# EAGLE board UsbEuroPowerAdaptor (EAGLE 9.6.1)
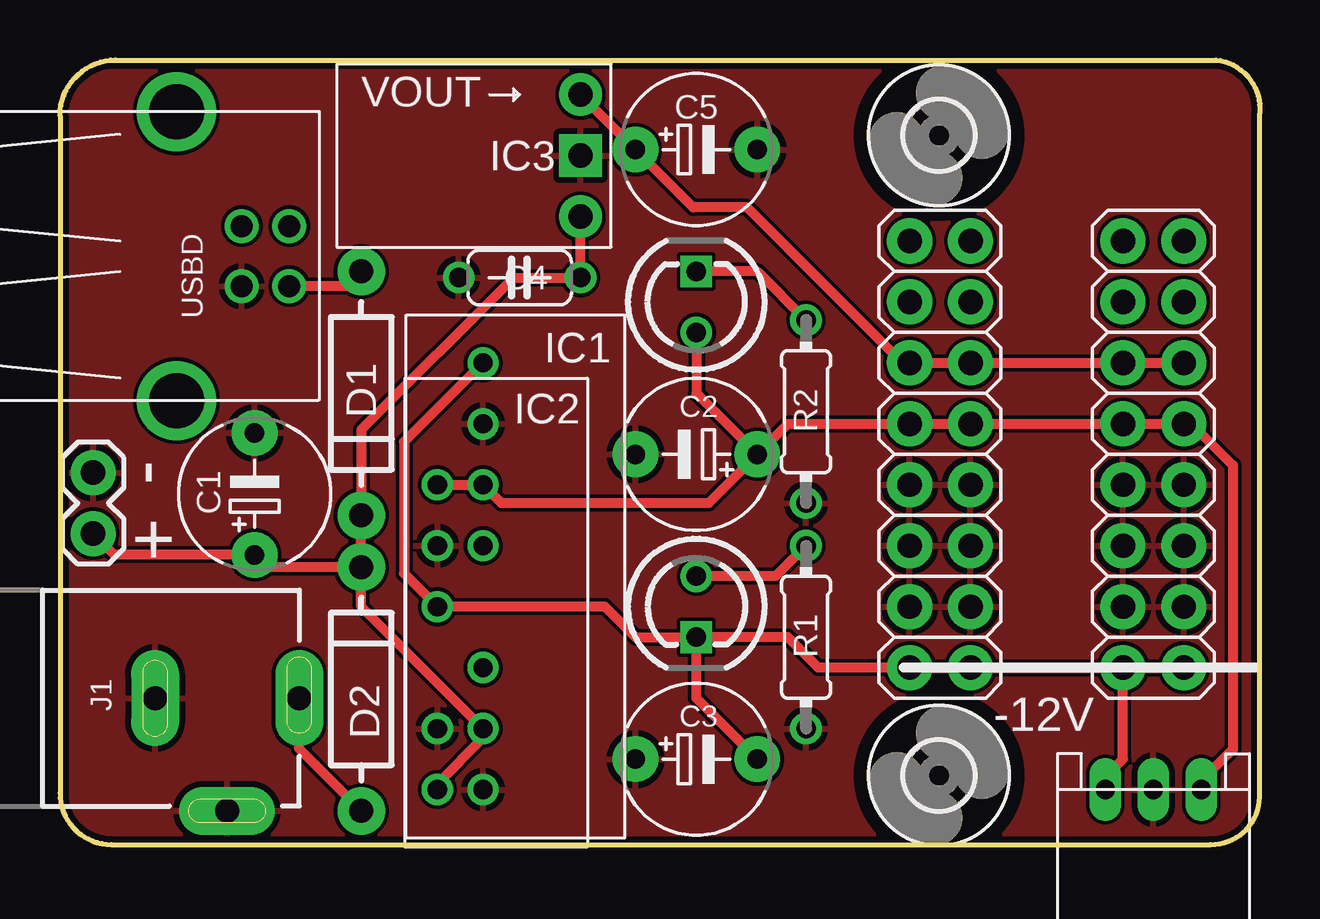
[diagram p0: board, top side]
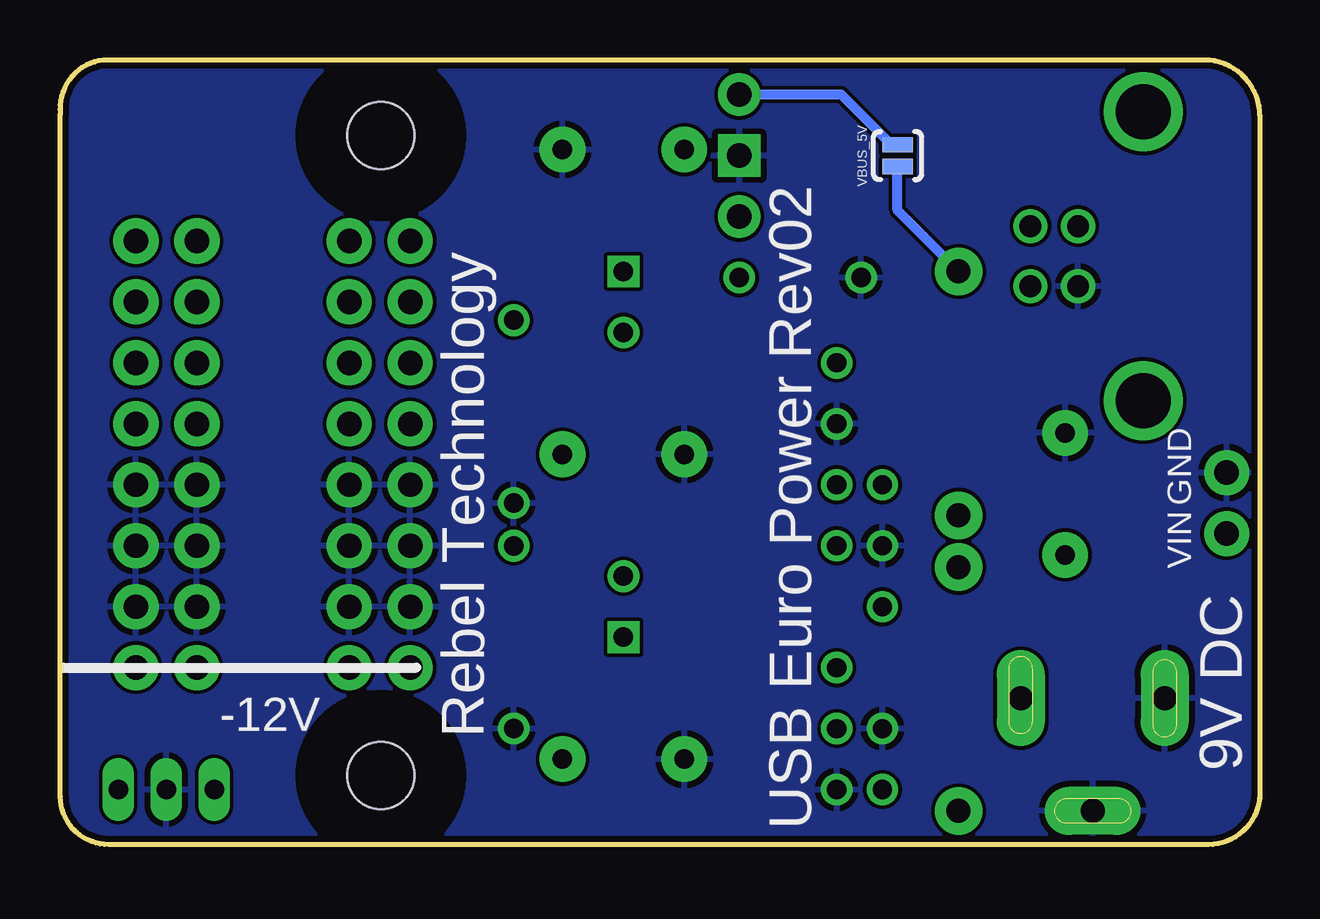
[diagram p1: board, bottom side, seen from below]

Size 50.01 x 32.69 mm. Coordinates in mm from the lower left corner, seen from the top.
Outline: 2.31,32.69 48.2,32.69 arc-90 50,30.45 50,2 arc-90 47.96,0 2.15,0 arc-90 0,2.15 0,30.38 arc-90 2.31,32.69
Copper layers (1*16): Top 0.035mm / dielectric 1.5mm / Bottom 0.035mm
Design rules "SeeedStudio_2layer_DRU_no_angle_20140221": minimum track width 6mil, minimum drill 12mil, track to track 6mil, track to pad 6mil, pad to pad 6mil, via to via 6mil, smd to smd 0mil, copper to edge 10mil, drill to drill 10mil, minimum pad ring 10mil, minimum via ring 6mil, stop-mask expansion 2mil, vias tented up to drill 100mil, thermal gap 10mil
Net classes: 1 power: width 0.178 mm, drill 0.305 mm, clearance 0.178 mm to class 0, clearance 0.178 mm

## Footprints (pad centres in the part's own frame; a part is rotated, then mirrored left to right if it is on the bottom)
E5-6 = drill 0.813 pad 1.905: + -2.54,0; - 2.54,0
C050-024X044 = drill 0.813: 1 -2.54,0; 2 2.54,0
DIODE-1N4001 = drill 1 pad 1.981: A -5.08,0; C 5.08,0
CON-JST_PH_3W = drill 0.8 long: P1 0,0; P2 -2,0; P3 -4,0
TEC-2 = drill 0.8: P1 0,0; P2 0,-2.54; P3 0,-5.08; P5 0,-10.16; P6 0,-12.7; P7 0,-15.24; P8 0,-17.78
TBA-2 = drill 0.8: P1 0,0; P2 0,-2.54; P4 0,-7.62; P5 0,-10.16; P6 0,-12.7
REG_S9V11F5 = drill 1.016 pad 1.778 square: GND 0,0 | drill 1.016 pad 1.778: VIN -2.54,0; VOUT 2.54,0
DC_JACK_SLOT = drill 1 pad 2 long: GND 0,4.743; GNDBREAK 4.697,7.742; PWR 0,10.749
1X02 = drill 1.016 pad 1.88: 1 0,0; 2 2.54,0
LED3MM = drill 0.813: A -1.27,0 | drill 0.813 square: K 1.27,0
0204/7 = drill 0.813: 1 -3.81,0; 2 3.81,0
2,8 = hole 2.8: 0,0
2X8 = drill 1.016 pad 1.88: 1 0,0; 2 0,2.54; 3 2.54,0; 4 2.54,2.54; 5 5.08,0; 6 5.08,2.54; 7 7.62,0; 8 7.62,2.54; 9 10.16,0; 10 10.16,2.54; 11 12.7,0; 12 12.7,2.54; 13 15.24,0; 14 15.24,2.54; 15 17.78,0; 16 17.78,2.54
USB-B-H = drill 0.914: D+ 0,1.25; D- 1.981,1.25; GND 0,-1.25; VBUS 1.981,-1.25 | drill 2.286: P$1 -2.718,-6.02; P$2 -2.718,6.02
SJ_2S-NO = smd 0.635 x 1.27: 1 -0.45,0; 2 0.45,0

## Placement (x,y rotation side)
C1  47u  [E5-6]  8.11,14.61 90 top
C2  47u  [E5-6]  26.53,16.26 180 top
C3  47u  [E5-6]  26.53,3.56 0 top
C4  100n  [C050-024X044]  19.16,23.63 180 top
C5  47u  [E5-6]  26.53,28.96 0 top
D1  1N5817  [DIODE-1N4001]  12.55,18.8 270 top
D2  1N4001  [DIODE-1N4001]  12.55,6.48 90 top
EXT  CON-JST_PH_3W  [CON-JST_PH_3W]  43.57,2.29 180 top
IC1  TEC-2SIP  [TEC-2]  17.64,2.29 180 top
IC2  TBA-2SIP  [TBA-2]  15.73,2.29 180 top
IC3  REG_S9V11F5  [REG_S9V11F5]  21.7,28.71 90 top
J1  POWER_JACK  [DC_JACK_SLOT]  -0.78,6.1 270 top
JP1  [1X02]  1.38,15.5 270 top
LED1  [LED3MM]  26.53,9.91 270 top
LED2  [LED3MM]  26.53,22.61 90 top
R1  2k  [0204/7]  31.1,8.64 90 top
R2  2k  [0204/7]  31.1,18.04 90 top
U$1  [2,8]  36.64,29.55 0 top
U$2  M08X2  [2X8]  46.84,7.37 90 top
U$3  [2,8]  36.64,2.88 0 top
U$6  M08X2  [2X8]  37.95,7.37 90 top
USBD  [USB-B-H]  7.58,24.52 0 top
VBUS_5V  SOLDERJUMPERNO  [SJ_2S-NO]  15.1,28.71 90 bottom

## Library data of the parts
C1-C5 EXT IC1-IC3 J1 LED1 LED2 R1 R2 = Rebel
D1 D2 JP1 U$2 U$6 VBUS_5V = SparkFun
U$1 U$3 = holes
USBD = con-usb-3

## Nets
+5V [power]: C5.+ IC3.VOUT U$2.11 U$2.12 U$6.11 U$6.12 VBUS_5V.2
+9V: C1.+ C4.1 D1.C D2.C IC1.P2 IC2.P1 IC3.VIN JP1.2
+12V: C2.+ EXT.P3 IC1.P6 IC2.P6 LED2.A U$2.9 U$2.10 U$6.9 U$6.10
-12V: C3.- EXT.P1 IC1.P8 IC2.P4 LED1.K U$2.1 U$2.2 U$6.1 U$6.2
EXT_USB_D_VBUS: D1.A USBD.VBUS VBUS_5V.1
GND: C1.- C2.- C3.+ C4.2 C5.- EXT.P2 IC1.P1 IC1.P7 IC2.P2 IC2.P5 IC3.GND J1.GND J1.GNDBREAK JP1.1 R1.1 R2.1 U$2.3 U$2.4 U$2.5 U$2.6 U$2.7 U$2.8 U$6.3 U$6.4 U$6.5 U$6.6 U$6.7 U$6.8 USBD.GND
N$1: LED2.K R2.2
N$2: LED1.A R1.2
N$9: D2.A J1.PWR

## Tracks (layer width: path | path; a pad name or v marks a point on that pad's centre or on a via)
+5V
  Top 0.406: IC3.VOUT C5.+ 26.39,26.55 28.64,26.55 35.11,20.07 U$6.12 U$6.11 U$2.12 U$2.11
  Bottom 0.406: VBUS_5V.2 15.35,29.16 17.44,31.25 IC3.VOUT
+9V
  Top 0.406: D2.C 8.62,11.56 C1.+ 2.27,12.07 JP1.2 | D2.C D1.C 12.55,17.28 18.91,23.63 C4.1 IC3.VIN | IC2.P1 15.73,2.54 17.64,4.45 IC1.P2 12.55,9.91 D2.C
+12V
  Top 0.406: IC2.P6 IC1.P6 18.4,14.23 27.03,14.23 C2.+ | EXT.P3 47.57,2.65 48.89,3.96 48.89,15.8 47.16,17.53 U$2.9 U$2.10 U$6.9 U$6.10 30.34,17.53 C2.+ | LED2.A 26.53,18.8 C2.+
-12V
  Top 0.406: U$2.2 U$6.1 U$6.2 31.61,7.37 30.34,8.64 LED1.K | U$2.2 U$2.1 | EXT.P1 43.57,2.83 44.3,3.56 U$2.2 | IC1.P8 14.34,16.77 14.34,11.3 IC2.P4 22.71,9.91 23.98,8.64 LED1.K | C3.- 26.53,6.1 LED1.K
EXT_USB_D_VBUS
  Top 0.406: USBD.VBUS 11.94,23.27 D1.A
  Bottom 0.406: D1.A 15.1,26.42 VBUS_5V.1
GND
  pour Top: 55.7,-7.06 -4.94,-7.06 -4.94,37.25 55.7,37.25
  pour Bottom: 55.96,-7.33 -4.94,-7.33 -4.94,38.25 55.96,38.25
N$1
  Top 0.406: LED2.K 29.07,23.88 R2.2
N$2
  Top 0.406: R1.2 29.83,11.18 LED1.A
N$9
  Top 0.406: D2.A 9.97,3.99 J1.PWR

## Text on the board
tPlace: - | + | -12V
bPlace: GND | VIN | 9V DC | -12V | Rebel Technology | USB Euro Power Rev02